# EAGLE board Flodar_Board_V1-3-1 (EAGLE 9.6.2)
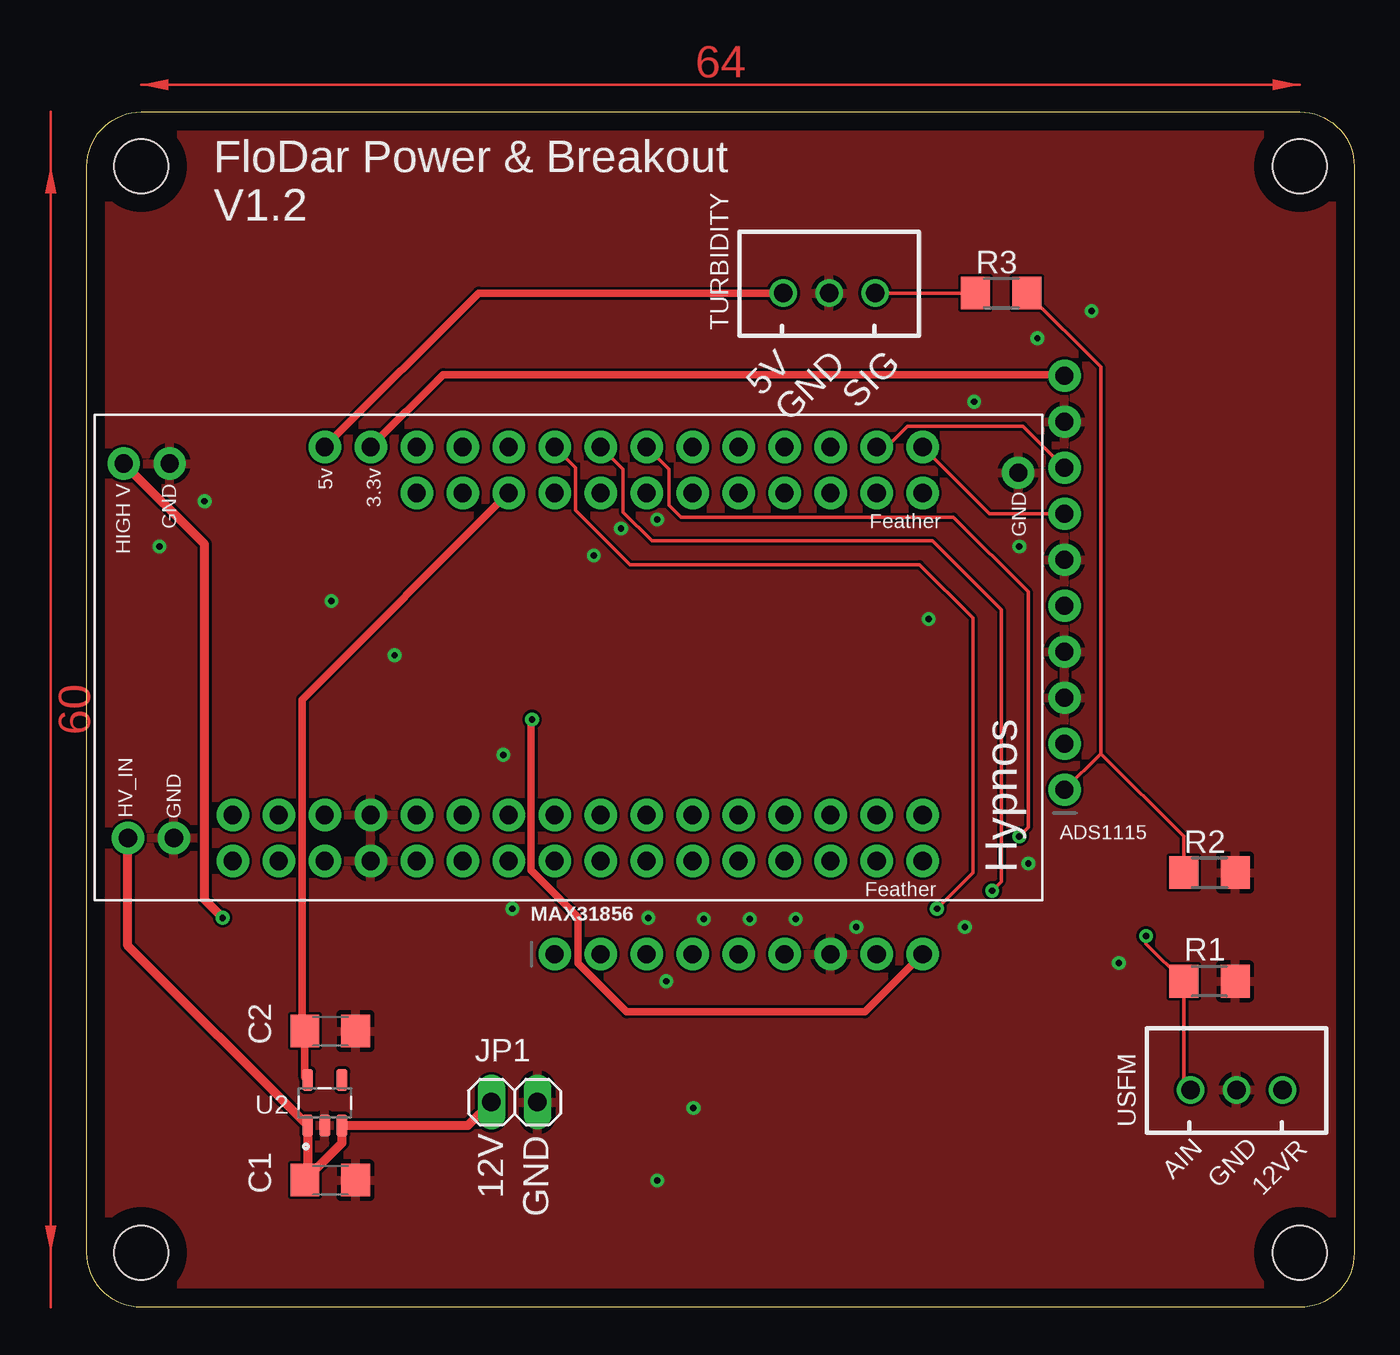
[diagram p0: board, top side]
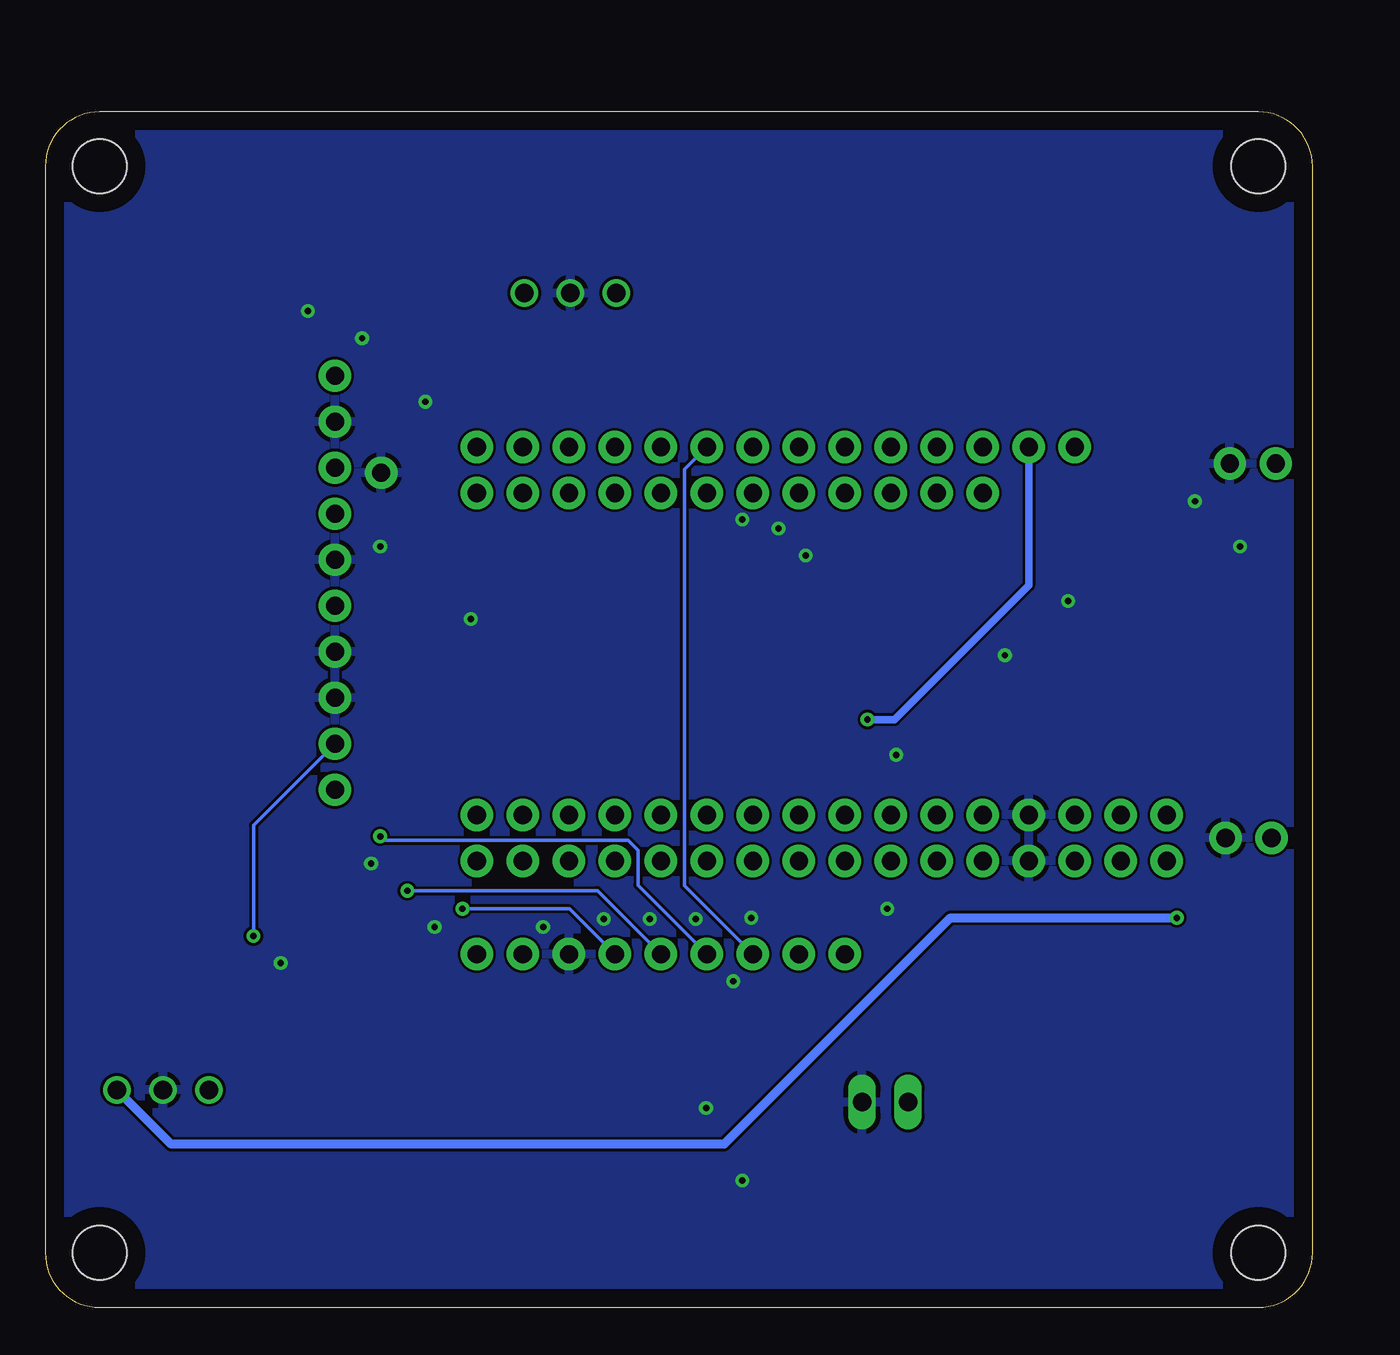
[diagram p1: board, bottom side, seen from below]

Size 70 x 66 mm. Coordinates in mm from the lower left corner, seen from the top.
Outline: 0,63 arc-90 3,66 67,66 arc-90 70,63 70,3 arc-90 67,0 3,0 arc-90 0,3 0,63
Copper layers (1*16): Top 0.035mm / dielectric 1.5mm / Bottom 0.035mm
Design rules "default": minimum track width 6mil, minimum drill 0.35mm, track to track 6mil, track to pad 6mil, pad to pad 6mil, via to via 6mil, smd to smd 6mil, copper to edge 40mil, drill to drill 6mil, minimum pad ring 10mil, minimum via ring 8mil, stop-mask expansion 4mil, vias tented up to drill 0mil, thermal gap 10mil
Holes 3 mm at 67,3 67,63 3,63 3,3

## Footprints (pad centres in the part's own frame; a part is rotated, then mirrored left to right if it is on the bottom)
1X10_ROUND70 = drill 1 pad 1.778: 1 -11.43,0; 2 -8.89,0; 3 -6.35,0; 4 -3.81,0; 5 -1.27,0; 6 1.27,0; 7 3.81,0; 8 6.35,0; 9 8.89,0; 10 11.43,0
C1206 = smd 1.6 x 1.8: 1 -1.4,0; 2 1.4,0
1X02 = drill 1.016 long: 1 -1.27,0; 2 1.27,0
1X09_ROUND_70 = drill 1 pad 1.778: 1 -10.16,0; 2 -7.62,0; 3 -5.08,0; 4 -2.54,0; 5 0,0; 6 2.54,0; 7 5.08,0; 8 7.62,0; 9 10.16,0
R1206 = smd 1.6 x 1.803: 1 -1.422,0; 2 1.422,0
JST-XH-03-PACKAGE-ROUND-PAD = drill 1.016: 1 -2.54,0; 2 0,0; 3 2.54,0
SOT95P280X145-5N = smd 1.21 x 0.59: 1 -1.255,0.95; 2 -1.255,0; 3 -1.255,-0.95; 4 1.255,-0.95; 5 1.255,0.95
HYPNOS_V3 = drill 1 pad 1.778: 3.3 -22.86,25.4; 3.3V_RAIL 0,20.32; 3VRAIL -20.32,25.4; 5 -2.54,-5.08; 5_1 0,-5.08; 5V_RAIL 0,22.86; 5VRAIL 0,12.7; 5VUSB -2.54,12.7; 6 -2.54,-2.54; 6_1 0,-2.54; 9 -2.54,0; 9_1 0,0; 10 -2.54,2.54; 10_1 0,2.54; 11 -2.54,5.08; 11_1 0,5.08; 12 -2.54,7.62; 12_1 0,7.62; 13 -2.54,10.16; 13_1 0,10.16; A0 -22.86,17.78; A01 -20.32,17.78; A1 -22.86,15.24; A2 -22.86,12.7; A3 -22.86,10.16; A4 -22.86,7.62; A5 -22.86,5.08; A11 -20.32,15.24; A21 -20.32,12.7; A31 -20.32,10.16; A41 -20.32,7.62; A51 -20.32,5.08; ARF -22.86,22.86; ARF1 -20.32,22.86; DFU -22.86,-10.16; DFU1 -20.32,-10.16; EN -2.54,15.24; EN_1 0,15.24; GND -22.86,20.32; GND1 -1.422,-15.44; GND2 -20.32,20.32; GND3 -21.59,31.194; GND4 -0.914,31.423; HV -0.914,33.963; HVIN -21.59,33.734; MISO -22.86,-2.54; MISO1 -20.32,-2.54; MOSI -22.86,0; MOSI1 -20.32,0; RST -22.86,27.94; RST1 -20.32,27.94; RX -22.86,-5.08; RX1 -20.32,-5.08; SCK -22.86,2.54; SCK1 -20.32,2.54; SCL -2.54,-7.62; SCL1 0,-7.62; SDA -2.54,-10.16; SDA1 0,-10.16; TX -22.86,-7.62; TX1 -20.32,-7.62; VBAT -2.54,17.78; VBAT_1 0,17.78

## Placement (x,y rotation side)
ADS1115  [1X10_ROUND70]  54,40 90 top
C1  1uF  [C1206]  13.44,7.02 0 top
C2  3.3uF  [C1206]  13.44,15.25 0 top
JP1  [1X02]  23.61,11.33 0 top
MAX31856  [1X09_ROUND_70]  36,19.5 0 top
R1  150  [R1206]  62,18 0 top
R2  2.2k  [R1206]  62,24 180 top
R3  3.3k  [R1206]  50.5,56 180 top
TURBIDITY  JST-XH-03-PIN-ROUND-PAD  [JST-XH-03-PACKAGE-ROUND-PAD]  41,56 0 top
U2  LP2981-33DBVR  [SOT95P280X145-5N]  13.14,11.29 90 top
U$1  HYPNOS_V3  [HYPNOS_V3]  36,47.5 90 top
USFM  JST-XH-03-PIN-ROUND-PAD  [JST-XH-03-PACKAGE-ROUND-PAD]  63.5,12 0 top

## Library data of the parts
ADS1115 MAX31856 = microbuilder
C1 C2 = rcl; SPICEPREFIX: C
JP1 = pinhead
R1-R3 = adafruit
TURBIDITY USFM = Rembrandt Electronics - JST XH Connectors v1-0
U2 = LP2981-33DBVR; AVAILABILITY: In Stock; DESCRIPTION: 100-mA, 16-V, low-dropout voltage regulator with enable 5-SOT-23 -40 to 125; MF: Texas Instruments; MP: LP2981-50DBVR; PACKAGE: SOT-23-5 Texas Instruments; PRICE: None; PURCHASE-URL: https://pricing.snapeda.com/search/part/LP2981-50DBVR/?ref=eda
U$1 = HYPNOS_V3

## Nets
12V: C1.1 JP1.1 U2.1 U2.3 U$1.HVIN
!CS: MAX31856.3 U$1.10_1
!FAULT: MAX31856.2
AIN2: ADS1115.2 R1.1 USFM.1
AIN3: ADS1115.1 R2.2 R3.1
ALERT: ADS1115.5
DRDY: MAX31856.1
GND: ADS1115.3 ADS1115.4 ADS1115.6 ADS1115.9 C1.2 C2.2 JP1.2 MAX31856.7 R1.2 R2.1 TURBIDITY.2 U2.2 U$1.GND U$1.GND1 U$1.GND2 U$1.GND3 U$1.GND4 USFM.2
H_3V: ADS1115.10 MAX31856.9 U$1.3.3V_RAIL
H_5V: TURBIDITY.1 U$1.5V_RAIL
HV: U$1.HV USFM.3
SCK: MAX31856.6 U$1.13_1
SCL: ADS1115.8 U$1.SCL1
SD0: MAX31856.5 U$1.12_1
SDA: ADS1115.7 U$1.SDA1
SDI: MAX31856.4 U$1.11_1
SIGNAL: R3.2 TURBIDITY.3
USB: C2.1 U2.5 U$1.5VUSB

## Tracks (layer width: path | path; a pad name or v marks a point on that pad's centre or on a via)
12V
  Top 0.508: JP1.1 21.05,10.04 U2.3 14.09,9.07 C1.1 12.19,7.17 U2.1 2.27,19.96 U$1.HVIN
!CS
  Bottom 0.203: MAX31856.3 34.7,23.28 34.7,46.26 U$1.10_1
AIN2  (via drill 0.35)
  Top 0.203: v58.5,20.5 58.5,20.08 R1.1 60.58,12.38 USFM.1
  Bottom 0.203: ADS1115.2 58.5,26.61 v58.5,20.5
AIN3
  Top 0.203: R3.1 56,51.92 56,30.57 | ADS1115.1 56,30.57 | 56,30.57 60.58,25.99 R2.2
GND  (via drill 0.35)
  other vias: 28,41.5 29.5,43 31.5,43.5 51.5,42 46.5,38 48.5,21 42.5,21 31,21.5 39.15,21.43 36.61,21.43 34.07,21.43 4,42 6.5,44.5 52.5,53.5 55.5,55 49,50 52,24.5 57,19 23,30.5 31.5,7 33.5,11 17,36 13.5,39 23.5,22 32,18
  pour Top: -0.5,66 -0.5,-0.5 71,-0.5 71,66.5 -0.5,66.5
  pour Bottom: -0.5,66.5 -0.5,-0.5 71,-0.5 71,66.5
H_3V  (via drill 0.35)
  Top 0.406: U$1.3.3V_RAIL 19.68,51.5 53.93,51.5 ADS1115.10 | v24.58,32.45 24.55,32.41 24.55,24.12 27.14,21.53 27.14,18.98 29.81,16.31 42.97,16.31 MAX31856.9
  Bottom 0.406: U$1.3.3V_RAIL 15.68,39.85 23.08,32.45 v24.58,32.45
H_5V
  Top 0.406: U$1.5V_RAIL 21.64,56 TURBIDITY.1
HV  (via drill 0.35)
  Top 0.508: U$1.HV 6.5,42.12 6.5,22.5 v7.5,21.5
  Bottom 0.508: USFM.3 63.04,9 32.5,9 21,20.5 20,21.5 v7.5,21.5
SCK  (via drill 0.35)
  Top 0.203: U$1.13_1 27,46.34 27,44 29.99,41.01 45.99,41.01 48.94,38.06 48.94,23.98 v46.95,22
  Bottom 0.203: MAX31856.6 41.04,22 v46.95,22
SCL
  Top 0.203: U$1.SCL1 44.18,47.5 45.32,48.64 51.71,48.64 ADS1115.8
SD0  (via drill 0.35)
  Top 0.203: U$1.12_1 29.62,46.26 29.62,43.9 31.21,42.31 46.69,42.31 50.5,38.5 50.5,23.5 v50,23
  Bottom 0.203: v50,23 39.5,23 MAX31856.5
SDA
  Top 0.203: U$1.SDA1 49.85,43.81 ADS1115.7
SDI  (via drill 0.35)
  Top 0.203: U$1.11_1 32.16,46.26 32.16,44.28 32.82,43.63 47.87,43.63 52,39.5 52,26.5 v51.5,26
  Bottom 0.203: v51.5,26 51.28,25.78 37.82,25.78 37.27,25.23 37.27,23.31 MAX31856.4
SIGNAL
  Top 0.203: TURBIDITY.3 R3.2
USB
  Top 0.406: U$1.5VUSB 11.89,33.55 11.89,15.39 C2.1 12.04,12.7 U2.5
(copper drawn outside any net)
  shapes: Top area x4

## Text on the board
tPlace: 5V | GND | SIG | AIN | 12V | GND | 12VR | GND
tNames: FloDar Power & Breakout / V1.2